# Altium PCB Main.PcbDoc
Units mm, origin at the board's own origin, x right, y up, seen from the top; angles counter-clockwise.
Board outline 16.7 x 22.22 mm, 2 copper layers (Top Layer, Bottom Layer); 3 components, 13 nets, 37 pads, 5 vias.
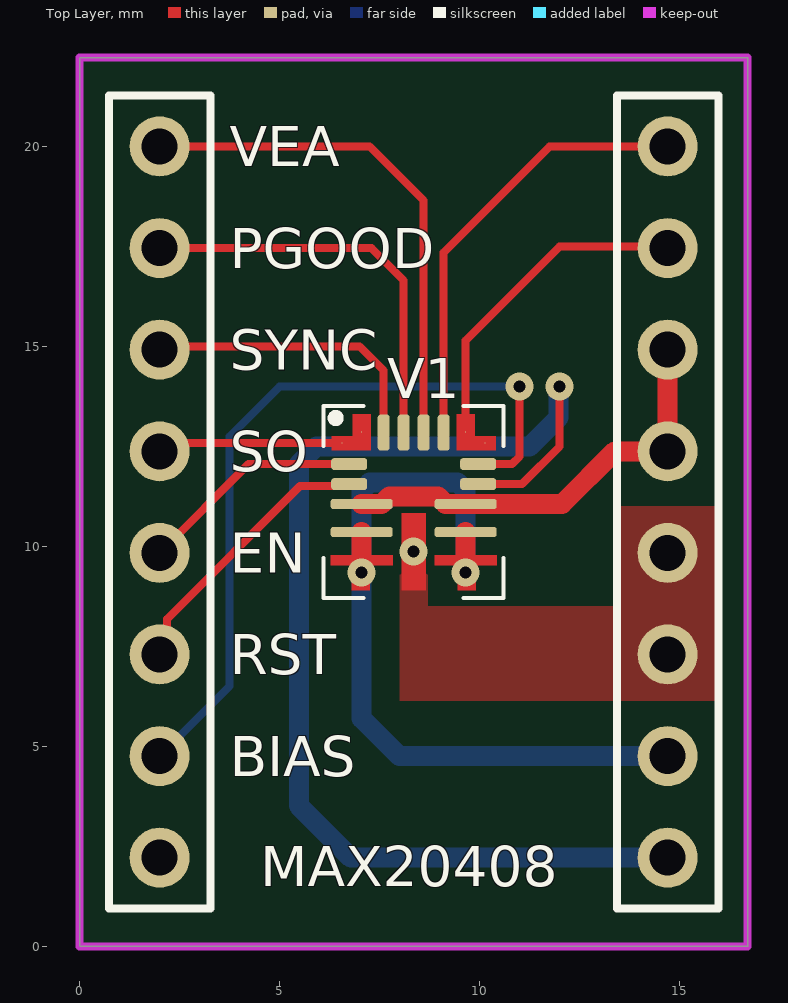
[diagram p0: Top Layer view]
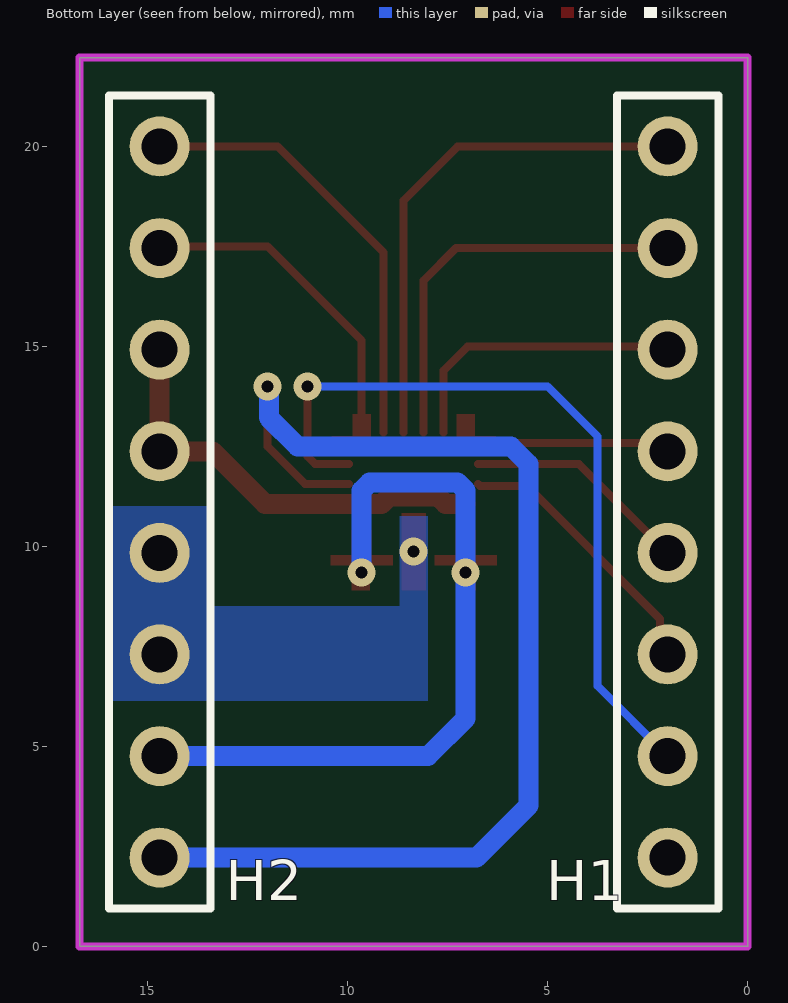
[diagram p1: Bottom Layer view, seen from below]

## Layer stack, top to bottom
Top Solder: solder mask 0.0102, Solder Resist, Dk 3.5
Top Layer: signal copper 0.0356
Dielectric 1: dielectric 0.32, FR-4, Dk 4.8
Bottom Layer: signal copper 0.0356
Bottom Solder: solder mask 0.0102, Solder Resist, Dk 3.5

## Board outline
0,0 16.7,0 16.7,22.22 0,22.22

## Design rules (kind name [scope] priority, off if disabled: settings)
BoardOutlineClearance [All] p1: gap=0.2 ignorepadtopadclearanceinfootprint=FALSE
Clearance "inPolygon Clearance" [InPolygon] p1: gap=0.3 ignorepadtopadclearanceinfootprint=TRUE // this rule ensures that every net within a polygon of a different net has a set clearance from the poly
Clearance "Different Diff Pair" [All] p2: gap=0.2 ignorepadtopadclearanceinfootprint=TRUE
Clearance "Same Diff Pair" [All] p3: gap=0.1 ignorepadtopadclearanceinfootprint=TRUE
Clearance "Different Nets" [not InAnyDifferentialPair] p4: gap=0.3 ignorepadtopadclearanceinfootprint=TRUE except(0.1: Arc-SMDPad Arc-THPad Arc-Via Arc-Text Track-SMDPad Track-THPad Track-Via Track-Text SMDPad-Text THPad-Text Via-Text Fill-Text Poly-Text Region-Text Text-Text; 0.12: Arc-Arc Arc-Track Track-Track; 0.15: SMDPad-SMDPad SMDPad-THPad SMDPad-Via THPad-THPad THPad-Via Via-Via; 0.2: Arc-Hole Track-Hole SMDPad-Hole THPad-Hole Via-Hole Fill-Hole Poly-Hole Region-Hole Text-Hole)
Clearance "Same Net" [not InAnyDifferentialPair] p5: gap=0 ignorepadtopadclearanceinfootprint=TRUE except(0.1: THPad-Via; 0.18: Arc-Arc Arc-Track Track-Track)
ComponentClearance [All] p1: gap=0.102 collisioncheckmode=3 verticalgap=0.102 showdistances=TRUE
DiffPairsRouting "Ethernet Routing" [InDifferentialPairClass('Ethernet_Pairs')] p1: maxlimit=0.2 minlimit=0.2 mostfreqgap=0.2 toplayer_minwidth=0.25 toplayer_maxwidth=0.25 toplayer_prefwidth=0.25 bottomlayer_minwidth=0.25 bottomlayer_maxwidth=0.25 bottomlayer_prefwidth=0.25 impedanceprofiledriven=TRUE maxuncoupledlength=12.7
DiffPairsRouting "USB Routing" [InDifferentialPairClass('USB_Pairs')] p2: maxlimit=0.127 minlimit=0.127 mostfreqgap=0.127 toplayer_minwidth=0.23 toplayer_maxwidth=0.23 toplayer_prefwidth=0.23 bottomlayer_minwidth=0.23 bottomlayer_maxwidth=0.23 bottomlayer_prefwidth=0.23 impedanceprofiledriven=TRUE impedanceprofileid={F14BA31F-77FA-453E-8734-53F45B48A614} maxuncoupledlength=12.7
DiffPairsRouting "CAN Routing" [InDifferentialPairClass('CAN_Pairs')] p3: maxlimit=0.5 minlimit=0.5 mostfreqgap=0.5 toplayer_minwidth=0.201 toplayer_maxwidth=0.201 toplayer_prefwidth=0.201 bottomlayer_minwidth=0.201 bottomlayer_maxwidth=0.201 bottomlayer_prefwidth=0.201 impedanceprofiledriven=TRUE maxuncoupledlength=12.7
Height [All] p1: minheight=0 maxheight=1816.048 prefheight=12.7
HoleSize [All] p1: absolutevalues=TRUE maxlimit=6.3 minlimit=0.3 maxpercent=80.000 minpercent=20.000
HoleToHoleClearance [All] p1: gap=0.25 allowstackedmicrovias=FALSE
Length [All] p1: maxlimit=43.432 minlimit=0 usedelayunits=TRUE mindelay=0.000000 maxdelay=10000.000000
MatchedLengths "Diff Pair Matched Delays" [InDifferentialPairClass('Ethernet_Pairs') or InDifferentialPairClass('USB_Pairs') or InDifferentialPairClass('CAN_Pairs')] p1: tolerance=5 checknetsindiffpair=TRUE checkdiffpairvsdiffpair=FALSE checkxsignals=FALSE checkothers=FALSE usedelayunits=TRUE delaytolerance=100.000000
MinimumAnnularRing [All] p1: minimumring=0.2
MinimumSolderMaskSliver [All] p1: minsoldermaskwidth=0
PlaneClearance "Supply Net Clearance" [InNetClass('Supply_Nets')] p1: clearance=0.5
PlaneClearance "All Nets" [All] p2: clearance=0.3
PolygonConnect "Supply Nets" [InNetClass('Supply_Nets')] p1: connectstyle=Direct reliefconductorwidth=0.3 reliefentries=4 polygonreliefangle="90 Angle" airgapwidth=0.254
PolygonConnect General [All] p2: connectstyle=Relief reliefconductorwidth=0.254 reliefentries=4 polygonreliefangle="90 Angle" airgapwidth=0.254
RoutingVias [All] p1: holewidth=0.2 width=0.35 viastyle="Through Hole" minholewidth=0.15 minwidth=0.3 maxholewidth=6.3 maxwidth=6.55
SilkToSilkClearance [All] p1: silktosilkclearance=0
SilkToSolderMaskClearance [All] p1: minsilkscreentomaskgap=0 clearancetoexposedcopper=TRUE
SolderMaskExpansion [All] p1: expansion=0.075 istentingtop=FALSE
SupplyNets "Schematic Supply Nets_5" [InNet('PGND')] p1: voltage=0.000
SupplyNets "Schematic Supply Nets_3" [InNet('GND')] p2: voltage=0.000
UnRoutedNet [All] p1: checkbadconnections=TRUE
Width "nRF Width" [InNetClass('nRF Signal')] p1: maxlimit=0.379 minlimit=0.379 preferedwidth=0.379 impedanceprofiledriven=TRUE minimp=50.000000 maximp=50.000000 favimp=50.000000 checkconnectedcopper=TRUE
Width [All] p2: maxlimit=100 minlimit=0.1 preferedwidth=0.3
20 further rules are at their usual default settings.

## Classes and differential pairs
net class Supply_Nets: FB GND OUT PGND Vout Vsupply

## Components (designator, comment, footprint, x,y, rotation, side; value= is the part's Value field where it differs from the comment)
H1 "1x8 Header" "[Header] 1x8 Male" 2,20 r270 bottom
H2 "1x8 Header" "[Header] 1x8 Male" 14.7,20 r270 bottom
V1 "[Switching] 0.8-10V Adjustable Buck" "[Switching] 0.8-10V Adjustable Buck" 8.35,11.11 r0 top

## Footprints (in the part's own frame and the unit in brackets; to place one, negate y for a bottom-side part, rotate by r counter-clockwise, add the part's x,y. Pads: shape width x height; smd on the part's side, far side on the other; paste and mask are expansions set on the pad)
"[Header] 1x8 Male" [mm]
  round 1.5 hole 0.9: 1(0,0) 2(2.54,0) 3(5.08,0) 4(7.62,0) 5(10.16,0) 6(12.7,0) 7(15.24,0) 8(17.78,0)
  silkscreen extent -1.27,-1.27 19.05,1.27, body extent -1.27,-1.27 19.05,1.27, height 9.5
"[Switching] 0.8-10V Adjustable Buck" [mm] "MAX20408AFOF/VY+"
  rrect50% 0.9x0.3 smd: 1(-1.612,0.95) 2(-1.612,0.45) 10(1.612,0.45) 11(1.612,0.95)
  rrect50% 1.55x0.25 smd: 3(-1.299,-0.05) 4(-1.299,-0.75) 8(1.3,-0.75) 9(1.3,-0.05)
  round 0.025 smd: 5(-1.3,-1.763) 6(0,-1.238) 7(1.3,-1.763) 12(1.3,1.75) 12(1.787,1.475) 17(-1.788,1.475) 17(-1.3,1.75)
  rect 0.127x0.127 smd paste-0.064 mask-0.064: 10(1.612,0.45) 11(1.612,0.95)
  rrect50% 0.3x0.9 smd: 13(0.75,1.736) 14(0.25,1.736) 15(-0.25,1.737) 16(-0.75,1.737)
  Top Layer region: 2.05,1.65 1.525,1.65 1.525,1.3 2.05,1.3
  Top Layer region: 1.525,1.65 1.525,1.3 1.075,1.3 1.075,2.2 1.525,2.2
  Top Layer region: -2.05,1.65 -1.525,1.65 -1.525,1.3 -2.05,1.3
  Top Layer region: -1.525,1.65 -1.525,1.3 -1.075,1.3 -1.075,2.2 -1.525,2.2
  Top Layer region: 1.1,-1.575 0.525,-1.575 0.525,-1.325 2.075,-1.325 2.075,-1.575 1.55,-1.575 1.55,-2.2 1.1,-2.2
  Top Layer region: -1.1,-1.575 -0.525,-1.575 -0.525,-1.325 -2.075,-1.325 -2.075,-1.575 -1.55,-1.575 -1.55,-2.2 -1.1,-2.2
  Top Layer region: -0.3,-0.275 0.3,-0.275 0.3,-2.2 -0.3,-2.2
  silkscreen extent -2.25,-2.4 2.25,2.4, body extent -1.75,-1.88 1.75,1.88, height 0.8

## Part data
H1 H2: library part "[Header] 1x8 Male", "2.54mm pitch"
V1: "MAX20408AFOF/VY+", Supplier Part Number 1=505-MAX20408AFOF/VY+-ND, Supplier 1=DigiKey

## Via types
v1: diameter 0.7, hole 0.3, Top Layer to Bottom Layer, 5 vias

## Nets (pads, with @x,y where several pads share a name; then routed paths per layer and width w, separated by ;. In a path a pad name is that pad's centre, name@x,y a point inside that pad or via, vN(x,y) a via of type N, cw(c..) or ccw(c..) an arc to the next point about the centre after c; other vN are vias at no path point)
BIAS: H1.7 V1.11 | length 19.3
  Top Layer w0.2: V1.11@9.962,12.06 10.81,12.06 11,12.25 v1(11,14)
  Bottom Layer w0.2: H1.7 3.75,6.51 3.75,12.75 5,14 v1(11,14)
BST: H1.6 V1.2 | length 6.9
  Top Layer w0.2: H1.6 2.188,7.488 2.188,8.188 5.51,11.51 6.687,11.51 V1.2
EN: H1.5 V1.1 | length 5.7
  Top Layer w0.2: H1.5 4.22,12.06 V1.1
FB: H2.2 V1.12 | length 8.9
  Top Layer w0.2: V1.12@10.137,12.585 9.925,12.585 9.65,12.86 9.65,15.15 12,17.5 14.66,17.5 H2.2
GND: H2.8 V1.10 | length 30
  Top Layer w0.2: V1.10@9.962,11.56 11.06,11.56 12,12.5 v1(12,14)
  Bottom Layer w0.5: v1(12,14) 11.97,13.97 11.97,13.22 11.25,12.5 5.919,12.5 5.479,12.06 5.479,3.521 6.78,2.22 H2.8
OUT: H2.1 V1.13 | length 11.2
  Top Layer w0.2: V1.13 9.1,17.35 11.75,20 H2.1
PGND: H2.7 V1.4 V1.5 V1.7 V1.8 | length 20.6
  Top Layer w0.5: v1(7.05,9.348) V1.4 ; v1(9.65,9.348) V1.8
  Bottom Layer w0.5: v1(9.65,9.348) 9.65,11.401 9.451,11.6 7.249,11.6 7.05,11.401 v1(7.05,9.348) 7.05,5.7 7.99,4.76 H2.7
PGOOD: H1.2 V1.15 | length 10.2
  Top Layer w0.2: H1.2 7.29,17.46 8.1,16.65 V1.15
SYNC: H1.3 V1.16 | length 7.4
  Top Layer w0.2: H1.3 2.08,15 7,15 7.6,14.4 V1.16
SYNCOUT: H1.4 V1.17 | length 5.2
  Top Layer w0.2: H1.4 2.205,12.585 6.562,12.585 6.775,12.585 V1.17@7.05,12.86
VEA: H1.1 V1.14 | length 13
  Top Layer w0.2: H1.1 7.25,20 8.6,18.65 V1.14
Vout: H2.5 H2.6 V1.6
  other v1: 8.35,9.873
Vsupply: H2.3 H2.4 V1.3 V1.9 | length 10.9
  Top Layer w0.5: V1.3 7.551,11.06 7.745,11.255 8.955,11.255 9.149,11.06 12.06,11.06 13.38,12.38 H2.4 H2.3
pads on no net: H1.8

## Polygon pours and split planes (outlines as drawn)
Vout on Top Layer "Vout Top Poly" (solid, pour order 0): 8,10.75 8.7,10.75 8.7,8.5 13.5,8.5 13.5,11 16,11 16,6.14 8,6.14
Vout on Bottom Layer "Vout Bottom Poly" (solid, pour order 1): 8,10.75 8.7,10.75 8.7,8.5 13.5,8.5 13.5,11 16,11 16,6.14 8,6.14

## Keep-outs
Keep-Out Layer:
  the board outline again, w0.2

## Silkscreen, mask and mechanical layers (free items; w line width, h text height)
Top Overlay:
  text "VEA" at 3.75,19.5 h1
  text "PGOOD" at 3.75,16.96 h1
  text "SYNC" at 3.75,14.42 h1
  text "SO" at 3.75,11.88 h1
  text "EN" at 3.75,9.34 h1
  text "RST" at 3.75,6.8 h1
  text "BIAS" at 3.75,4.26 h1
  text "MAX20408" at 4.518,1.5 h1
Poly Planning:
  lines w0.2: 6,10.75 6,11.25 ; 8,6.14 13.5,6.14 15.9,6.14 15.9,11 13.5,11 13.5,8.5 8.7,8.5 8.7,10.75 8,10.75 8,6.14